# Altium PCB pcb_final.PcbDoc
Units mm, origin at the board's own origin, x right, y up, seen from the top; angles counter-clockwise.
Board outline 100 x 100 mm, 2 copper layers (Top Layer, Bottom Layer); 49 components, 45 nets, 164 pads, 0 vias.
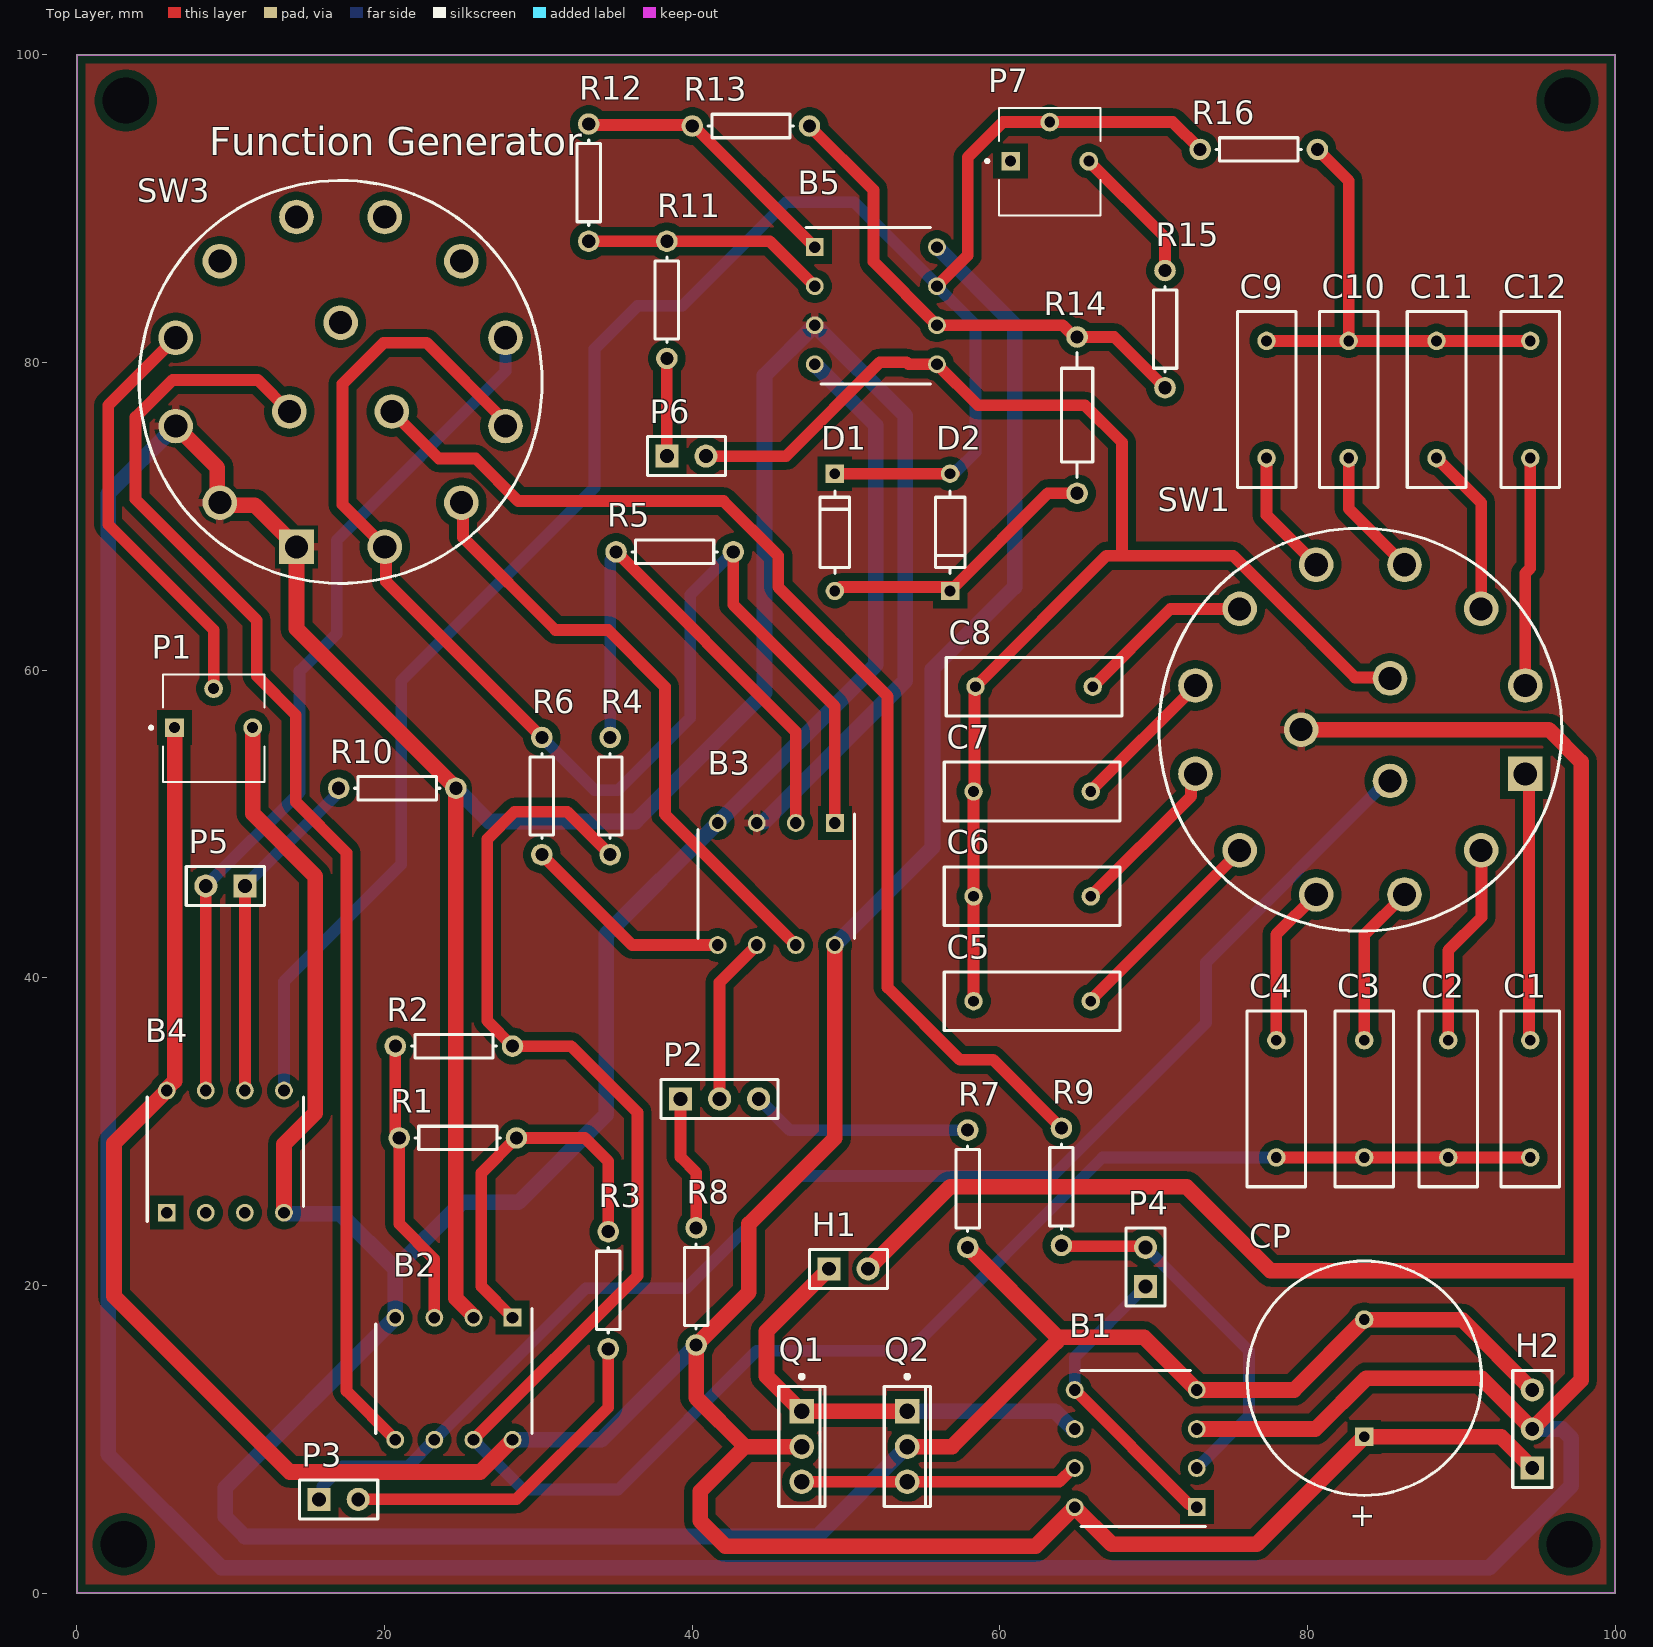
[diagram p0: Top Layer view]
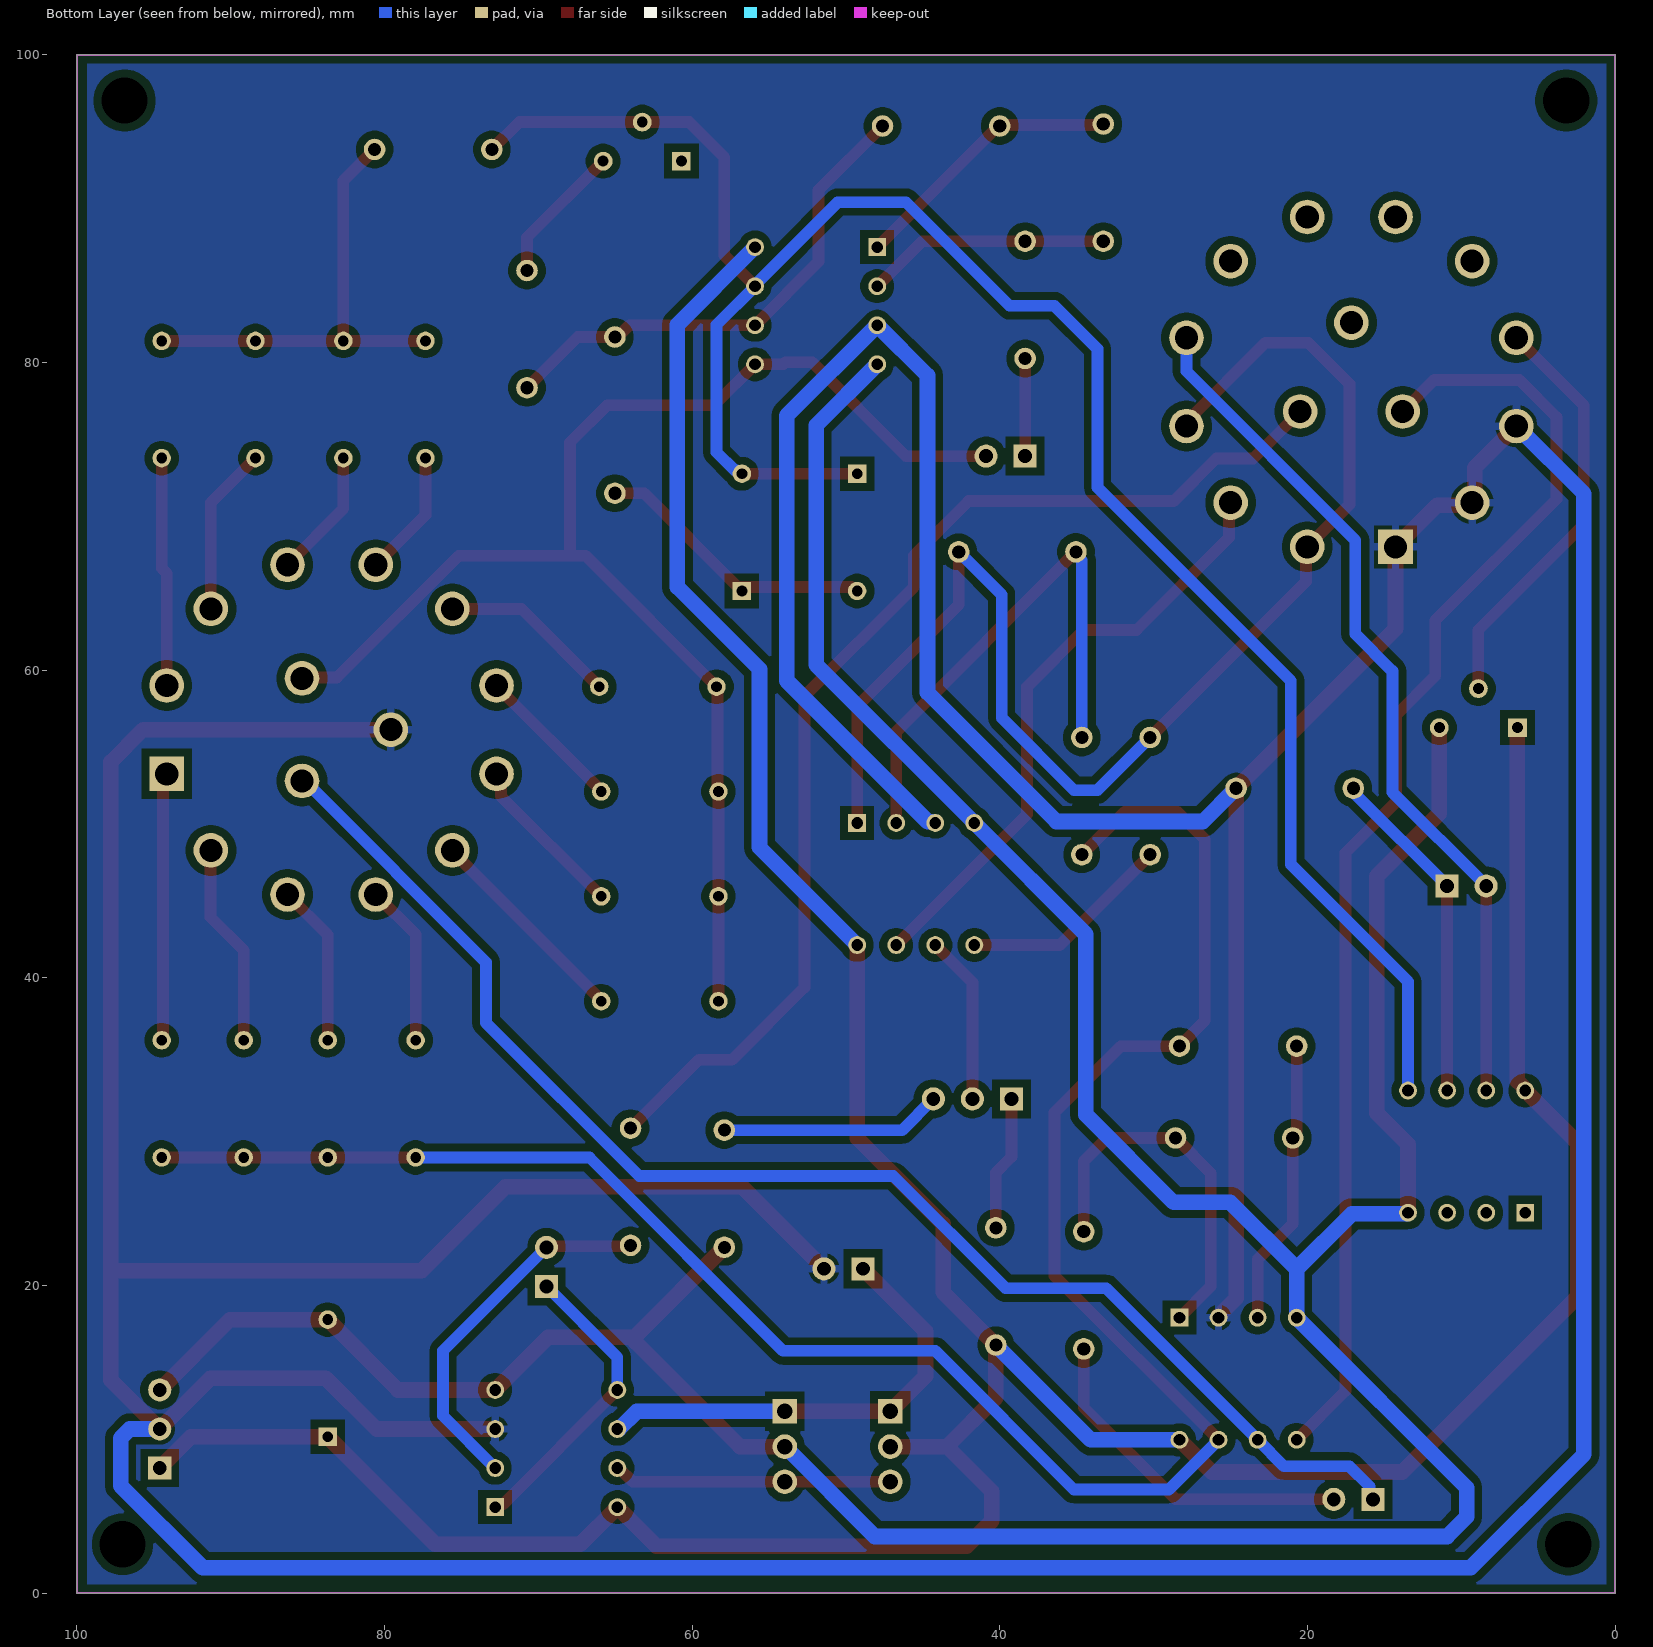
[diagram p1: Bottom Layer view, seen from below]

## Layer stack, top to bottom
Top Solder: solder mask 0.0102, Solder Resist, Dk 3.5
Top Layer: signal copper 0.0356
Dielectric 1: dielectric 0.32, FR-4, Dk 4.8
Bottom Layer: signal copper 0.0356
Bottom Solder: solder mask 0.0102, Solder Resist, Dk 3.5

## Board outline
0,0 100,0 100,100 0,100 0,99.949

## Design rules (kind name [scope] priority, off if disabled: settings)
BoardOutlineClearance [All] p1: gap=0.2 ignorepadtopadclearanceinfootprint=FALSE
Clearance [All] p1: gap=0.127 ignorepadtopadclearanceinfootprint=FALSE except(0.25: Arc-Hole Track-Hole SMDPad-Hole THPad-Hole Via-Hole Fill-Hole Poly-Hole Region-Hole Text-Hole)
ComponentClearance [All] p1: gap=0.127 collisioncheckmode=3 verticalgap=0.127 showdistances=TRUE
DiffPairsRouting [All] p1: maxlimit=0.254 minlimit=0.127 mostfreqgap=0.127 toplayer_minwidth=0.127 toplayer_maxwidth=25.4 toplayer_prefwidth=0.127 bottomlayer_minwidth=0.127 bottomlayer_maxwidth=25.4 bottomlayer_prefwidth=0.127 maxuncoupledlength=12.7
Height [All] p1: minheight=0 maxheight=1816.048 prefheight=12.7
HoleSize [All] p1: absolutevalues=TRUE maxlimit=6.3 minlimit=0.3 maxpercent=80.000 minpercent=20.000
HoleToHoleClearance [All] p1: gap=0.25 allowstackedmicrovias=FALSE
MinimumAnnularRing [All] p1: minimumring=0.076
MinimumSolderMaskSliver [All] p1: minsoldermaskwidth=0
PlaneClearance [All] p1: clearance=0.127
PlaneConnect PlaneConnectPowerPads [InPadClass('PowerPads')] p1: planeconnectstyle=Direct reliefexpansion=0.508 reliefentries=4 reliefconductorwidth=0.254 reliefairgap=0.254
PlaneConnect [All] p2: pad.planeconnectstyle=Relief pad.reliefexpansion=0.3 pad.reliefentries=4 pad.reliefconductorwidth=0.127 pad.reliefairgap=0.127 via.planeconnectstyle=Direct via.reliefexpansion=0.3 via.reliefentries=4 via.reliefconductorwidth=0.127 via.reliefairgap=0.127
PolygonConnect PolygonConnectPowerPads [All vs (InPadClass('PowerPads'))] p1: connectstyle=Direct reliefconductorwidth=0.254 reliefentries=4 polygonreliefangle="90 Angle" airgapwidth=0.254
PolygonConnect [All] p2: thpad.connectstyle=Relief thpad.reliefconductorwidth=0.127 thpad.reliefentries=4 thpad.polygonreliefangle="90 Angle" thpad.airgapwidth=0.127 smdpad.connectstyle=Relief smdpad.reliefconductorwidth=0.127 smdpad.reliefentries=4 smdpad.polygonreliefangle="90 Angle" smdpad.airgapwidth=0.127 via.connectstyle=Direct via.reliefconductorwidth=0.127 via.reliefentries=4 via.polygonreliefangle="90 Angle" via.airgapwidth=0.127
RoutingVias [All] p1: holewidth=0.3 width=0.6 viastyle="Through Hole" minholewidth=0.3 minwidth=0.6 maxholewidth=0.6 maxwidth=6.6
SilkToSilkClearance [All] p1: silktosilkclearance=0
SilkToSolderMaskClearance [IsPad] p1: minsilkscreentomaskgap=0.127 clearancetoexposedcopper=TRUE
SolderMaskExpansion [All] p1: expansion=0.075 istentingtop=FALSE
Width [All] p1: maxlimit=25.4 minlimit=0.127 preferedwidth=0.127 minimp=50.000000 maximp=50.000000 favimp=50.000000
20 further rules are at their usual default settings.

## Components (designator, comment, footprint, x,y, rotation, side; value= is the part's Value field where it differs from the comment)
B1 "AD826ANZ" DIP794W56P254L959H533Q8N 68.834,9.398 r180 top
B2 "AD826ANZ" DIP794W56P254L959H533Q8N 24.511,13.937 r270 top
B3 "AD826ANZ" DIP794W56P254L959H533Q8N 45.466,46.101 r270 top
B4 "AD826ANZ" DIP794W56P254L959H533Q8N 9.652,28.702 r90 top
B5 "AD826ANZ" DIP794W56P254L959H533Q8N 51.943,83.693 r0 top
C1 "1uF" RAD-0.3 94.488,32.131 r90 top
C2 "100nF" RAD-0.3 89.154,32.131 r90 top
C3 "10nF" RAD-0.3 83.693,32.131 r90 top
C4 "1nF" RAD-0.3 77.978,32.131 r90 top
C5 "Cap" RAD-0.3 62.103,38.481 r180 top value=470nF
C6 "Cap" RAD-0.3 62.103,45.297 r180 top value=100nF
C7 "Cap" RAD-0.3 62.103,52.112 r180 top value=10nF
C8 "Cap" RAD-0.3 62.23,58.928 r180 top value=1nF
C9 "Cap" RAD-0.3 77.343,77.597 r90 top value=470nF
C10 "Cap" RAD-0.3 82.677,77.597 r90 top value=100nF
C11 "Cap" RAD-0.3 88.392,77.597 r90 top value=10nF
C12 "Cap" RAD-0.3 94.488,77.597 r90 top value=1nF
CP "Cap Pol1" RB7.6-15 83.693,13.97 r270 top value=1uF
D1 "1N4148" FP-017AG-MFG 49.276,68.961 r270 top
D2 "1N4148" FP-017AG-MFG 56.769,68.961 r90 top
H1 "Output Header" HDR1X2 48.895,21.082 r0 top
H2 "Power" HDR1X3 94.615,8.128 r90 top
P1 "1M Pot sawtooth" TRIM_3362P-1-253LF 8.89,56.261 r0 top
P2 "100k Pot duty cycle" HDR1X3 39.243,32.131 r0 top
P3 "100k Pot freq" HDR1X2 15.748,6.096 r0 top
P4 "100k Pot amplitude" HDR1X2 69.469,19.939 r90 top
P5 "100k Pot sine amp" HDR1X2 10.922,45.974 r180 top
P6 "100k Pot sin freq" HDR1X2 38.354,73.914 r0 top
P7 "1k pot sin adjust" TRIM_3362P-1-253LF 63.246,93.091 r0 top
Q1 "BD139" ONSC-TO-225-3-77-09 47.117,9.525 r0 top
Q2 "BD140" ONSC-TO-225-3-77-09 53.975,9.525 r0 top
R1 "40k" AXIAL-0.3 24.765,29.591 r180 top value=1K
R2 "10k" AXIAL-0.3 24.511,35.56 r0 top value=1K
R3 "470" AXIAL-0.3 34.544,19.685 r270 top value=1K
R4 "10k" AXIAL-0.3 34.671,51.816 r90 top value=1K
R5 "40k" AXIAL-0.3 38.862,67.691 r0 top value=1K
R6 "1k" AXIAL-0.3 30.226,51.816 r270 top value=1K
R7 "1k" AXIAL-0.3 57.912,26.289 r90 top value=1K
R8 "1k" AXIAL-0.3 40.259,19.939 r270 top value=1K
R9 "10k" AXIAL-0.3 64.008,26.416 r270 top value=1K
R10 "10k" AXIAL-0.3 20.828,52.324 r0 top value=1K
R11 "1k" AXIAL-0.3 38.354,84.074 r270 top value=1K
R12 "10k" AXIAL-0.3 33.274,91.694 r90 top value=1K
R13 "10k" AXIAL-0.3 43.815,95.377 r0 top value=1K
R14 "220k" AXIAL-0.4 65.024,76.581 r270 top value=1K
R15 "10k" AXIAL-0.3 70.739,82.169 r90 top value=1K
R16 "10k" AXIAL-0.3 76.835,93.853 r0 top value=1K
SW1 "Capacitor selection switch" SW_A30403RNCQ 83.439,56.134 r0 top
SW3 "Wave selection switch" SW_A30403RNCQ 17.145,78.74 r270 top

## Footprints (in the part's own frame and the unit in brackets; to place one, negate y for a bottom-side part, rotate by r counter-clockwise, add the part's x,y. Pads: shape width x height; smd on the part's side, far side on the other; paste and mask are expansions set on the pad)
AXIAL-0.3 [mm] "Axial Device, Thru-Hole; 2 Leads; 0.3 in Pin Spacing"
  round 1.4 hole 0.85: 1(-3.81,0) 2(3.81,0)
  silkscreen extent -2.77,-0.76 2.77,0.76
AXIAL-0.4 [mm] "Axial Device, Thru-Hole; 2 Leads; 0.4 in Pin Spacing"
  round 1.4 hole 0.85: 1(-5.08,0) 2(5.08,0)
  silkscreen extent -4.06,-1.02 4.06,1.02
DIP794W56P254L959H533Q8N [mm]
  rect 1.16x1.16 / inner round 1.16 / far side rect 1.16x1.16 hole 0.76: 1(-3.97,3.81)
  round 1.16 hole 0.76: 2(-3.97,1.27) 3(-3.97,-1.27) 4(-3.97,-3.81) 5(3.97,-3.81) 6(3.97,-1.27) 7(3.97,1.27) 8(3.97,3.81)
  silkscreen extent -4.55,-5.08 3.56,5.08, body extent -4.98,-5.35 4.98,5.35
FP-017AG-MFG [mm]
  rect 1.2x1.2 hole 0.7 paste-1000 mask+0: 1(-3.813,0)
  round 1.2 hole 0.7 paste-1000 mask+0: 2(3.813,0)
  silkscreen extent -2.68,-0.95 2.68,0.95, body extent -4.51,-1.05 4.51,1.05, height 0.25
HDR1X2 [mm] "Connector; Header; 2 Position"
  rect 1.5x1.5 hole 0.9: 1(0,0)
  round 1.5 hole 0.9: 2(2.54,0)
  silkscreen extent -1.27,-1.27 3.81,1.27
HDR1X3 [mm] "Connector; Header; 3 Position"
  rect 1.5x1.5 hole 0.9: 1(0,0)
  round 1.5 hole 0.9: 2(2.54,0) 3(5.08,0)
  silkscreen extent -1.27,-1.27 6.35,1.27
ONSC-TO-225-3-77-09 [mm] "FM, 3-Leads, Body 7.8x3mm, Pitch 2.29mm"
  rect 1.6x1.6 hole 1: 1(0,2.29)
  round 1.6 hole 1: 2(0,0) 3(0,-2.29)
  silkscreen extent -1.49,-3.9 1.51,4.67, body extent -1.49,-3.9 1.51,3.9, height 13.64
RAD-0.3 [mm] "Radial Cap, Thru-Hole; 2 Leads; 0.3 in Pin Spacing"
  round 1.2 hole 0.7: 1(-3.81,0) 2(3.81,0)
  silkscreen extent -5.71,-1.91 5.71,1.91
RB7.6-15 [mm] "Polarized Capacitor (Radial); 2 Leads"
  rect 1.2x1.2 hole 0.7: 1(3.81,0)
  round 1.2 hole 0.7: 2(-3.81,0)
  silkscreen extent -7.62,-7.62 7.62,7.62
SW_A30403RNCQ [mm]
  rect 2.25x2.25 hole 1.5: 1(10.72,-2.87)
  round 2.25 hole 1.5: 2(7.85,-7.85) 3(2.87,-10.72) 4(-2.87,-10.72) 5(-7.85,-7.85) 6(-10.72,-2.87) 7(-10.72,2.87) 8(-7.85,7.85) 9(-2.87,10.72) 10(2.87,10.72) 11(7.85,7.85) 12(10.72,2.87) A(1.925,-3.334) B(-3.85,0) C(1.925,3.334)
  silkscreen extent -13.09,-13.09 13.1,13.09
TRIM_3362P-1-253LF [mm]
  rect 1.222x1.222 hole 0.714: 1(-2.54,0)
  round 1.222 hole 0.714: 2(0,2.54) 3(2.54,0)
  silkscreen extent -4.16,-3.53 3.3,3.47, body extent -1.55,-0.8 1.55,0.8, height 0.65

## Part data
B1 B2 B3 B4 B5: "AD826ANZ, Dual Operational Amplifier Voltage Feedback 29MHz 9 to 28V, 8-Pin MPDIP", Manufacturer_Name="Analog Devices", Mouser Part Number=584-AD826ANZ, Arrow Part Number=AD826ANZ, Arrow Price/Stock=https://www.arrow.com/en/products/ad826anz/analog-devices, Datasheet Link=https://datasheet.datasheetarchive.com/originals/distributors/SFDatasheet-4/sf-00084932.pdf, Geometry.Height=5.33mm, Manufacturer_Part_Number=AD826ANZ, Mouser Price/Stock=https://www.mouser.co.uk/ProductDetail/Analog-Devices/AD826ANZ/?qs=%2FtpEQrCGXCzLOrhkO%2Fe36g%3D%3D
C1 C2 C3 C4: library part Cap, "Capacitor", LatestRevisionDate=17-Jul-2002, LatestRevisionNote="Re-released for DXP Platform.", PackageDescription="Radial Cap, Thru-Hole; 2 Leads; 0.3 in Pin Spacing", PackageReference=RAD-0.3, Published=8-Jun-2000, Publisher="Altium Limited"
C5 C6 C7 C8 C9 C10 C11 C12: "Capacitor", LatestRevisionDate=17-Jul-2002, LatestRevisionNote="Re-released for DXP Platform.", PackageDescription="Radial Cap, Thru-Hole; 2 Leads; 0.3 in Pin Spacing", PackageReference=RAD-0.3, Published=8-Jun-2000, Publisher="Altium Limited"
CP: "Polarized Capacitor (Radial)", LatestRevisionDate=17-Jul-2002, LatestRevisionNote="Re-released for DXP Platform.", PackageDescription="Polarized Capacitor (Radial); 2 Leads", PackageReference=RB7.6-15, Published=8-Jun-2000, Publisher="Altium Limited"
D1 D2: library part CMP-07163-000046-1, "DIODE GEN PURP 100V 200MA DO35", Average Rectified Current=200mA, Capacitance=4pF, Case/Package=DO-35, Current=4A, Forward Current=300mA, Forward Voltage=1V, Max Forward Surge Current (Ifsm)=1A, Max Operating Temperature=175°C, Max Power Dissipation=500mW, Max Repetitive Reverse Voltage (Vrrm)=100V, Max Reverse Current=5uA, Min Operating Temperature=-65°C, Package Quantity=2000, Contact Plating=Tin, Current Rating=200mA, Diameter=1.91mm, Element Configuration=Single, Height=4.56mm, Lead Free="Lead Free", Length=4.56mm, Max Reverse Voltage (DC)=100V, Max Surge Current=4A, Mount="Through Hole", Number of Pins=2, Output Current=200mA, Outside Diameter=1.85mm, Packaging=Bulk, Peak Non-Repetitive Surge Current=4A, Polarity=Standard, Power Dissipation=500mW, Radiation Hardening=No, REACH SVHC="No SVHC", Recovery Time=4ns, Reverse Recovery Time=4ns, Reverse Voltage=100V, Series=-, Voltage=100V, Voltage Rating (DC)=100V, Weight=0.01lb, Width=1.91mm
H1 P3 P4 P5 P6: library part "Header 2", "Header, 2-Pin", LatestRevisionDate=17-Jul-2002, LatestRevisionNote="Re-released for DXP Platform.", Publisher="Altium Limited"
H2 P2: library part "Header 3", "Header, 3-Pin", LatestRevisionDate=17-Jul-2002, LatestRevisionNote="Re-released for DXP Platform.", Publisher="Altium Limited"
P1 P7: library part 3362P-1-253LF, "25 kOhms 0.5W, 1/2W PC Pins Through Hole Trimmer Potentiometer Cermet 1 Turn Top Adjustment", Package="3116 Bourns", Availability=Good, Check_prices=https://www.snapeda.com/parts/3362P-1-253LF/Bourns/view-part/493663/?ref=eda, MF=Bourns, MP=3362P-1-253LF, Price=None, Purchase-URL=https://pricing.snapeda.com/search/part/3362P-1-253LF/?ref=eda, SnapEDA_Link=https://www.snapeda.com/parts/3362P-1-253LF/Bourns/view-part/493663/?ref=snap
Q1: library part CMP-1048-01271-1, "Plastic Medium-Power Silicon NPN Transistor, 3-Pin TO-225, Bulk Box", Manufacturer="On Semiconductor", ComponentLink1Description="Manufacturer URL", ComponentLink1URL=http://www.onsemi.com/, ComponentLink2Description=Datasheet, ComponentLink2URL=http://www.onsemi.com/pub_link/Collateral/BD135-D.PDF, ComponentLink3Description="Package Specification", ComponentLink3URL=http://www.onsemi.com/pub_link/Collateral/77-09.PDF, DatasheetVersion="Rev. 16", IC Continuous (A)=1.5, Mounting Technology="Through Hole", PackageDescription="3-Pin Flange Mount, Vertical Straight Lead, Body 7.6 x 2.7 mm, Pitch 2.29 mm", PackageReference=TO-225-3-77-09, PackageVersion="Rev. AC, 12/2013", Packing="Bulk Box", PartNumber=BD139, Polarity=NPN, RoHS=FALSE
Q2: library part CMP-1048-00039-1, "Plastic Medium-Power Silicon PNP Transistor, 3-Pin TO-225, Bulk Box", Manufacturer="On Semiconductor", ComponentLink1Description="Manufacturer URL", ComponentLink1URL=http://www.onsemi.com/, ComponentLink2Description=Datasheet, ComponentLink2URL=http://www.onsemi.com/pub_link/Collateral/BD136-D.PDF, ComponentLink3Description="Package Specification", ComponentLink3URL=http://www.onsemi.com/pub_link/Collateral/77-09.PDF, DatasheetVersion="Rev. 15", IC Continuous (A)=1.5, Mounting Technology="Through Hole", PackageDescription="3-Pin Flange Mount, Vertical Straight Lead, Body 7.6 x 2.7 mm, Pitch 2.29 mm", PackageReference=TO-225-3-77-09, PackageVersion="Rev. AC, 12/2013", Packing="Bulk Box", PartNumber=BD140, Polarity=PNP, RoHS=FALSE
R1 R2 R3 R4 R5 R6 R7 R8 R9 R10 R11 R12 R13 R15 R16: library part Res1, "Resistor", LatestRevisionDate=17-Jul-2002, LatestRevisionNote="Re-released for DXP Platform.", PackageDescription="Axial Device, Thru-Hole; 2 Leads; 0.3 in Pin Spacing", PackageReference=AXIAL-0.3, Published=8-Jun-2000, Publisher="Altium Limited"
R14: library part Res2, "Resistor", LatestRevisionDate=17-Jul-2002, LatestRevisionNote="Re-released for DXP Platform.", PackageDescription="Axial Device, Thru-Hole; 2 Leads; 0.4 in Pin Spacing", PackageReference=AXIAL-0.4, Published=8-Jun-2000, Publisher="Altium Limited"
SW1 SW3: library part A30403RNCQ, "Rotary Switch 4 Position 3P4T 2.5A (AC), 350mA (DC) 125VAC Panel Mount, Through Hole", Package=None, Availability=Unavailable, Check_prices=https://www.snapeda.com/parts/A30403RNCQ/C&K/view-part/438327/?ref=eda, MF=C&K, MP=A30403RNCQ, Price=None, SnapEDA_Link=https://www.snapeda.com/parts/A30403RNCQ/C&K/view-part/438327/?ref=snap

## Free pads (board coordinates)
  round 0 hole 3 unplated: 2(3.175,97.028) 3(96.901,97.028) 4(97.028,3.175) 5(3.048,3.175)

## Nets (pads, with @x,y where several pads share a name; then routed paths per layer and width w, separated by ;. In a path a pad name is that pad's centre, name@x,y a point inside that pad or via, vN(x,y) a via of type N, cw(c..) or ccw(c..) an arc to the next point about the centre after c; other vN are vias at no path point)
CPAR1: C5.1 SW1.5 | length 13.8
  Top Layer w0.762: C5.1 65.913,38.544 75.589,48.22 SW1.5
CPAR2: C6.1 SW1.6 | length 10.8
  Top Layer w0.762: C6.1 72.434,51.818 72.434,52.979 SW1.6
CPAR3: C7.1 SW1.7 | length 9.7
  Top Layer w0.762: C7.1 65.913,52.155 72.719,58.961 SW1.7
CPAR4: C8.1 SW1.8 | length 11.6
  Top Layer w0.762: C8.1 71.096,63.984 SW1.8
CSER1: C9.1 SW1.9 | length 8.3
  Top Layer w0.762: C9.1 77.343,70.08 SW1.9
CSER2: C10.1 SW1.10 | length 8.4
  Top Layer w0.762: C10.1 82.677,70.486 SW1.10
CSER3: C11.1 SW1.11 | length 11
  Top Layer w0.762: C11.1 91.289,70.89 SW1.11
CSER4: C12.1 SW1.12 | length 14.9
  Top Layer w0.762: SW1.12 94.159,66.305 94.488,66.634 C12.1
NetB1_1: B1.1 B1.5 P4.1 | length 19.7
  Top Layer w0.762: B1.5 72.285,5.787 72.605,5.787 B1.1
  Bottom Layer w0.762: B1.5 64.864,15.334 P4.1
NetB1_2: B1.2 P4.2 R9.2 | length 24.1
  Top Layer w0.762: R9.2 64.072,22.543 69.406,22.543 P4.2
  Bottom Layer w0.762: P4.2 76.2,15.748 76.2,11.524 B1.2
NetB1_6: B1.6 H1.1 Q1.1 Q2.1 | length 30.1
  Top Layer w1.016: H1.1 44.831,17.018 44.831,14.101 Q1.1 Q2.1
  Bottom Layer w1.016: Q2.1 63.609,11.815 64.756,10.668 B1.6
NetB1_7: B1.7 Q1.3 Q2.3 | length 18.1
  Top Layer w0.762: Q1.3 Q2.3 63.863,7.235 64.756,8.128 B1.7
NetB2_1: B2.1 R1.1 R3.1 | length 24.6
  Top Layer w0.762: B2.1 26.289,19.939 26.289,27.305 R1.1 33.02,29.591 34.544,28.067 R3.1
NetB2_3: B2.3 R1.2 R2.1 | length 18.7
  Top Layer w0.762: R2.1 20.701,30.018 20.955,29.764 R1.2 20.955,24.003 23.241,21.717 B2.3
NetB2_6: B2.6 P3.1 SW1.A | length 90.7
  Bottom Layer w0.762: 15.949,6.932 17.272,8.255 21.529,8.255 B2.6 33.086,19.812 39.624,19.812 46.927,27.115 63.437,27.115 73.406,37.084 73.406,41.021 85.185,52.8 SW1.A
NetB2_7: B2.7 C1.1 C2.1 C3.1 C4.1 R2.2 R4.1 | length 138.6
  Top Layer w0.762: B2.7 36.449,20.635 36.449,31.242 32.131,35.56 R2.2 26.67,37.211 26.67,49.022 28.448,50.8 31.877,50.8 R4.1 ; C4.1 C3.1 C2.1 C1.1
  Bottom Layer w0.762: B2.7 29.017,6.731 35.179,6.731 44.196,15.748 54.102,15.748 66.675,28.321 C4.1
NetB3_1: B3.1 R5.2 R6.1 SW3.10 SW3.12 | length 87.8
  Top Layer w0.762: SW3.10 27.865,76.148 22.733,81.28 19.939,81.28 17.272,78.613 17.272,70.763 SW3.12 20.1,67.935 20.1,65.752 R6.1 ; R5.2 42.672,64.262 49.276,57.658 B3.1
  Bottom Layer w0.762: R6.1 33.655,52.197 35.179,52.197 39.878,56.896 39.878,64.897 R5.2
NetB3_2: B3.2 R4.2 R5.1 | length 34.7
  Top Layer w0.762: R5.1 46.736,56.007 B3.2
  Bottom Layer w0.762: R4.2 34.671,67.137 35.052,67.518 R5.1
NetB3_5: B3.5 R6.2 | length 13.9
  Top Layer w0.762: R6.2 36.101,42.131 B3.5
NetB3_6: B3.6 P2.2 | length 11
  Top Layer w0.762: P2.2 41.783,39.718 B3.6
NetB3_7: B3.7 SW3.11 | length 39.8
  Top Layer w0.762: SW3.11 25.104,70.781 25.104,68.622 31.115,62.611 34.544,62.611 38.227,58.928 38.227,50.64 B3.7
NetB4_5: B4.5 B5.7 D1.1 D2.2 P7.2 R16.1 | length 132.8
  Top Layer w0.762: D1.1 D2.2 D2.2@57.023,72.774 ; B5.7 57.912,86.962 57.912,93.345 60.198,95.631 P7.2 71.247,95.631 R16.1
  Bottom Layer w0.762: B4.5 13.462,39.751 21.082,47.371 21.082,59.309 33.655,71.882 33.655,80.899 36.449,83.693 39.37,83.693 46.101,90.424 50.546,90.424 55.913,85.057 B5.7 58.42,82.456 58.42,74.168 57.245,72.993 57.107,72.993 56.971,72.858 D2.2@56.971,72.749
NetB4_6: B4.6 P5.1 R10.1 | length 22.2
  Top Layer w0.762: B4.6 P5.1
  Bottom Layer w0.762: P5.1 16.896,51.948 16.896,52.202 R10.1
NetB4_7: B4.7 P5.2 SW3.9 | length 57
  Top Layer w0.762: B4.7 P5.2
  Bottom Layer w0.762: P5.2 14.478,52.07 14.478,59.944 16.891,62.357 16.891,68.453 27.865,79.427 SW3.9
NetB5_1: B5.1 R12.2 R13.1 | length 18
  Top Layer w0.762: R12.2 33.337,95.441 39.941,95.441 R13.1 40.099,95.377 B5.1
NetB5_2: B5.2 R11.1 R12.1 | length 15.9
  Top Layer w0.762: R12.1 R11.1 45.052,87.884 B5.2
NetB5_6: B5.6 R13.2 R14.1 R15.1 | length 32.9
  Top Layer w0.762: R13.2 51.792,91.21 51.792,86.544 B5.6 64.089,82.423 64.851,81.661 R14.1 67.437,81.661 R15.1
NetC1_2: C1.2 SW1.1 | length 17.5
  Top Layer w0.762: SW1.1 94.404,53.019 94.404,36.025 C1.2
NetC2_2: C2.2 SW1.2 | length 13.2
  Top Layer w0.762: C2.2 89.154,41.783 91.313,43.942 91.313,48.26 SW1.2
NetC3_2: C3.2 SW1.3 | length 10.6
  Top Layer w0.762: C3.2 83.693,42.798 SW1.3
NetC4_2: C4.2 SW1.4 | length 10.5
  Top Layer w0.762: C4.2 77.978,42.823 SW1.4
NetC9_2: C9.2 C10.2 C11.2 C12.2 R16.2 | length 30.4
  Top Layer w0.762: C9.2 C10.2 ; R16.2 82.677,91.821 C10.2 ; C12.2 C11.2 C10.2
NetD1_2: D1.2 D2.1 R14.2 | length 18.4
  Top Layer w0.762: D1.2 49.395,65.148 49.652,65.405 57.023,65.405 63.119,71.501 R14.2
NetP2_1: P2.1 R8.1 | length 8.8
  Top Layer w0.762: P2.1 39.243,28.35 40.259,27.334 R8.1
NetP2_3: P2.3 R7.2 | length 14.4
  Bottom Layer w0.762: P2.3 46.355,30.099 R7.2
NetP3_2: P3.2 R3.2 | length 22.5
  Top Layer w0.762: P3.2 28.575,6.096 34.544,12.065 R3.2
NetP6_1: P6.1 R11.2 | length 6.3
  Top Layer w0.762: P6.1 R11.2
NetP7_3: P7.3 R15.2 | length 9.2
  Top Layer w0.762: P7.3 70.739,88.138 R15.2
NetR9_1: R9.1 SW3.C | length 75.1
  Top Layer w0.762: SW3.C 23.532,73.762 25.933,73.762 28.702,70.993 42.037,70.993 45.593,67.437 45.593,65.405 52.705,58.293 52.705,39.37 57.404,34.671 59.563,34.671 R9.1
PAR: B1.3 B2.2 B3.3 B5.3 H1.2 H2.2 R10.2 SW1.B SW3.1 SW3.2 SW3.3 | length 470
  Top Layer w1.016: SW3.3 9.137,73.158 9.137,71.048 SW3.2 9.453,70.732 11.563,70.732 SW3.1 14.275,62.687 R10.2 24.638,19.158 25.781,18.015 B2.2 ; H1.2 56.769,26.416 72.136,26.416 77.597,20.955 97.79,20.955 ; B1.3 80.518,10.668 83.82,13.97 91.313,13.97 H2.2 97.79,13.843 97.79,20.955 ; SW1.B 95.693,56.134 97.79,54.037 97.79,20.955
  Bottom Layer w1.016: SW3.3 2.032,71.477 2.032,9.017 9.398,1.651 91.821,1.651 97.155,6.985 97.155,10.073 96.56,10.668 H2.2 ; R10.2 26.797,50.165 36.322,50.165 44.704,58.547 44.704,79.154 B5.3 53.848,76.548 53.848,59.309 44.686,50.147 44.272,50.147 B3.3
SEL: B2.5 SW3.A | length 85.3
  Top Layer w0.762: SW3.A 11.759,78.867 6.223,78.867 3.81,76.454 3.81,71.12 11.684,63.246 11.684,59.627 14.224,57.087 14.224,51.435 17.526,48.133 17.526,13.142 B2.5
SEL_SAW: P1.2 SW3.4 | length 27.5
  Top Layer w0.762: SW3.4 2.032,77.217 2.032,69.469 8.89,62.611 P1.2
SER: B5.5 C5.2 C6.2 C7.2 C8.2 P6.2 SW1.C | length 93.4
  Top Layer w0.762: P6.2 46.101,73.914 52.197,80.01 53.938,80.01 54.065,79.883 B5.5 58.58,77.216 65.532,77.216 67.945,74.803 67.945,67.564 67.818,67.437 ; C5.2 C6.2 C7.2 58.356,52.176 58.356,58.864 C8.2 66.929,67.437 67.818,67.437 ; SW1.C 85.307,59.525 83.096,59.525 75.184,67.437 67.818,67.437
VCC+: B1.8 B2.8 B3.8 B4.8 B5.8 CP.1 H2.1 P1.1 Q1.2 R8.2 | length 244.8
  Top Layer w1.016: P1.1 6.35,33.288 5.842,32.78 B4.8 2.413,29.243 2.413,19.304 13.843,7.874 26.228,7.874 B2.8 ; Q1.2 43.434,9.525 ; B3.8 49.276,29.591 43.688,24.003 43.688,19.558 R8.2 40.259,12.7 43.434,9.525 ; H2.1 92.583,10.16 CP.1 76.708,3.175 67.277,3.175 B1.8 62.324,3.048 42.164,3.048 40.513,4.699 40.513,6.604 43.434,9.525
  Bottom Layer w1.016: B2.8 34.097,9.967 R8.2 ; B3.8 55.626,48.481 55.626,60.071 60.96,65.405 60.96,82.456 B5.8
VCC-: B1.4 B2.4 B3.4 B4.4 B5.4 CP.2 H2.3 P1.3 Q2.2 R7.1 | length 243.7
  Top Layer w1.016: P1.3 11.43,50.673 15.494,46.609 15.494,31.216 13.462,29.184 B4.4 ; Q2.2 56.896,9.525 63.691,16.319 ; R7.1 63.691,16.7 63.691,16.319 ; H2.3 90.043,17.78 CP.2 79.121,13.208 B1.4 69.375,16.637 64.008,16.637 63.691,16.319
  Bottom Layer w1.016: B4.4 13.538,24.656 17.127,24.656 20.701,21.082 ; B5.4 51.943,75.913 51.943,60.358 B3.4 34.417,42.832 34.417,31.115 28.702,25.4 25.019,25.4 20.701,21.082 ; Q2.2 48.133,3.683 10.922,3.683 9.652,4.953 9.652,6.858 B2.4 20.701,21.082
pads on no net: B4.1 B4.2 B4.3 P7.1 SW3.5 SW3.6 SW3.7 SW3.8 SW3.B

## Polygon pours and split planes (outlines as drawn)
PAR on Top Layer "PAR_L01_P001" (solid, pour order 1): 0.254,99.822 99.441,99.822 99.695,99.568 99.695,0.508 0.381,0.508 0.254,0.635
PAR on Bottom Layer "PAR_L02_P002" (solid, pour order 2): 0.381,99.441 0.635,99.695 99.314,99.695 99.314,0.381 99.187,0.508 0,0.508

## Keep-outs
Keep-Out Layer:
  the board outline again, w0.127

## Silkscreen, mask and mechanical layers (free items; w line width, h text height)
Top Overlay:
  text "Function Generator" at 8.604,93.472 h1.83

## Text inside footprints (layer, text, board x,y; h text height)
CP: Top Overlay "+" at 82.956,5.838 h1.5 r270